# EAGLE board LoNet800L_RFM69W (EAGLE 7.5.0)
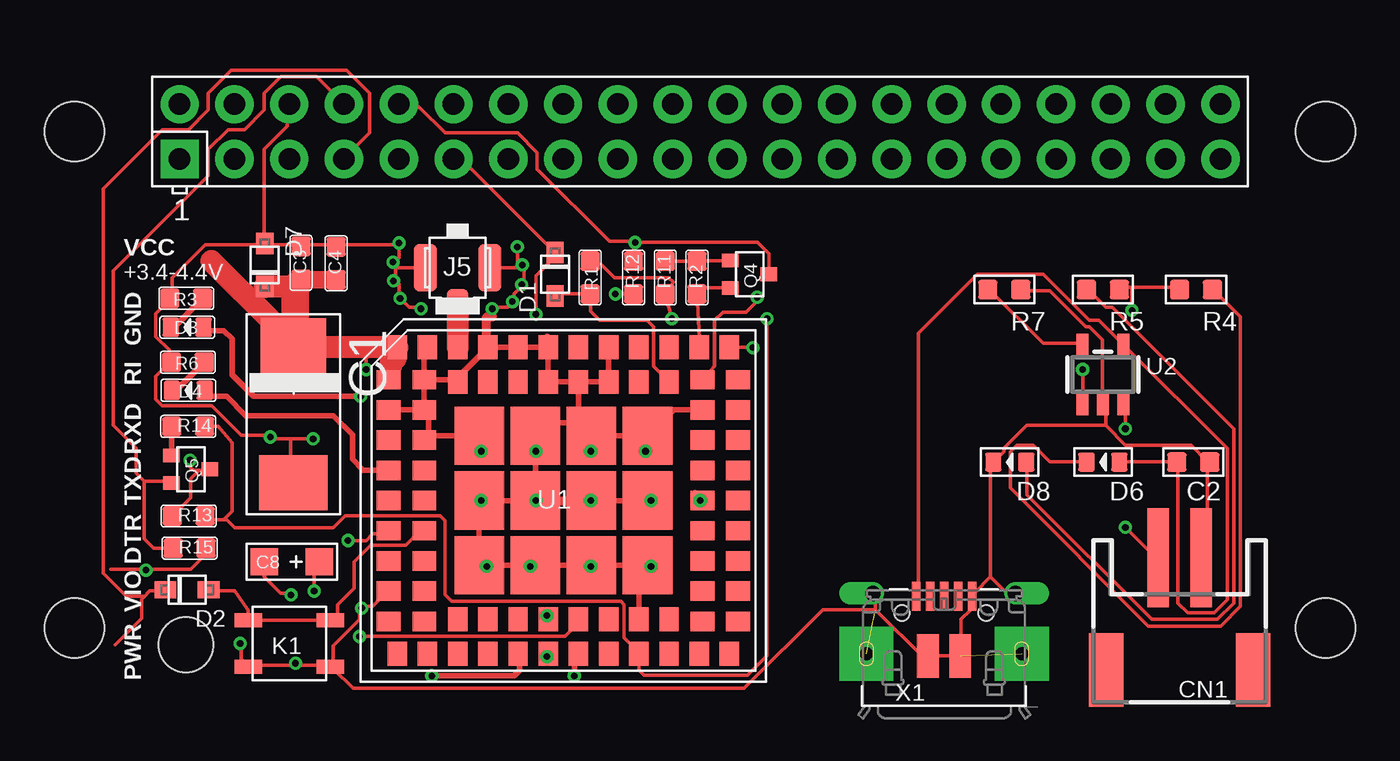
[diagram p0: board, top side]
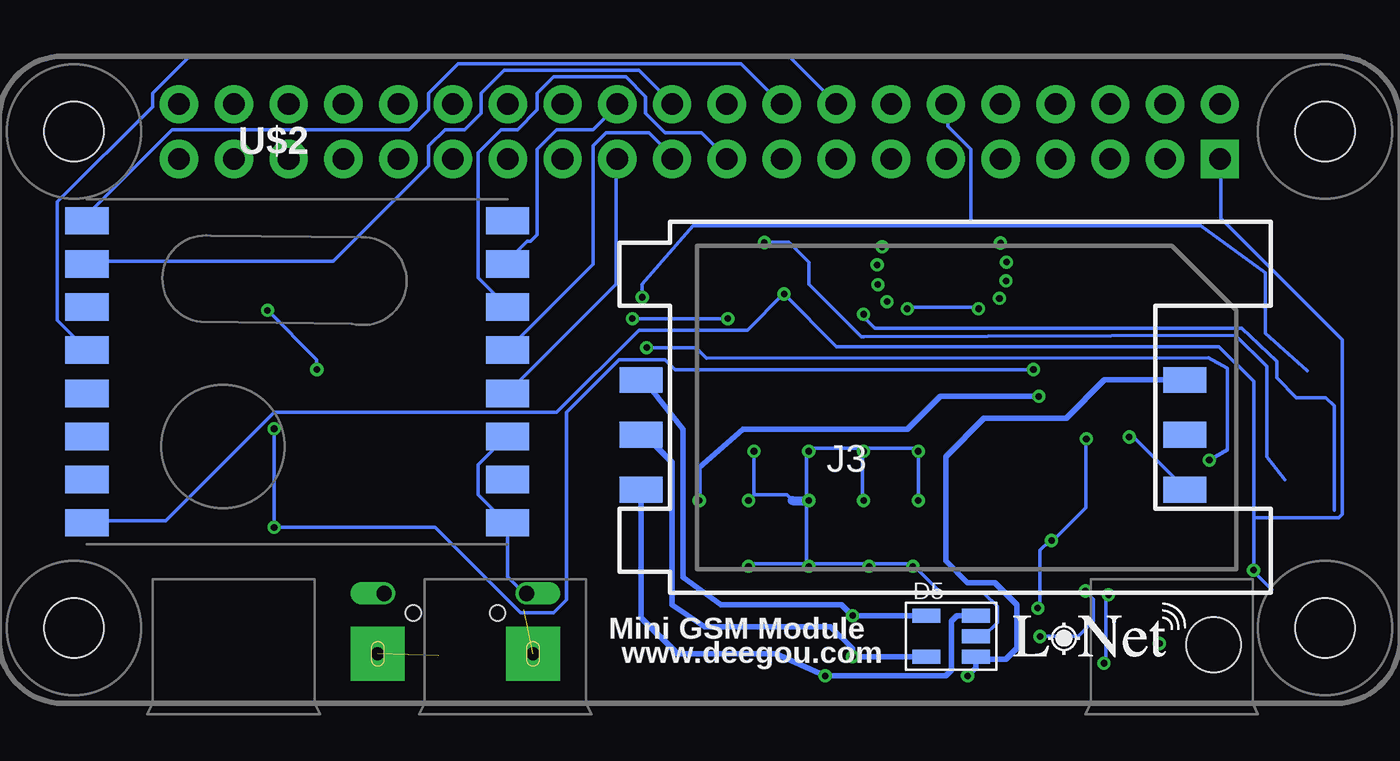
[diagram p1: board, bottom side, seen from below]

Size 7.8 x 1.1 mm. Coordinates in mm from the lower left corner, seen from the top.
Copper layers (1*2*15*16): Top 0.035mm / dielectric 0.2mm / layer 2 0.0175mm / dielectric 1.1mm / layer 15 0.0175mm / dielectric 0.2mm / Bottom 0.035mm
Design rules "DRU": minimum track width 6mil, minimum drill 12mil, track to track 6mil, track to pad 6mil, pad to pad 6mil, via to via 6mil, smd to smd 0mil, copper to edge 10mil, drill to drill 10mil, minimum pad ring 6mil, minimum via ring 6mil, stop-mask expansion 2mil, vias tented up to drill 25mil, thermal gap 10mil
Holes 2.54 mm at -31.25,0.98
tRestrict: area -20.9,1.8 to -7.4,15.3

## Footprints (pad centres in the part's own frame; a part is rotated, then mirrored left to right if it is on the bottom)
AVX-D = smd 2.54 x 3.048: + -3.175,0 | smd 2.54 x 3.175: - 3.175,0
C0603 = smd 0.889 x 0.889: 1 0,0.762; 2 0,-0.762
C0603' = smd 0.889 x 0.889: 1 -0.762,0; 2 0.762,0
AVX-A = smd 1.27 x 1.27: + -1.27,0; - 1.27,0
JSTPH2 = smd 1 x 4.6: 1 -1,-3.7; 2 1,-3.7 | smd 1.6 x 3.4: NC1 -3.4,1.5; NC2 3.4,1.5
SOD-323F = smd 1 x 0.8: A -1,0; C 1,0
0603 = smd 0.762 x 0.889: + -0.762,0; - 0.762,0
SOT23-5L = smd 0.65 x 1.3: 1 0,1.15; 2 0.95,1.15; 3 1.9,1.15; 4 1.9,-1.15; 5 0,-1.15
LED-0603 = smd 0.762 x 0.889: + -0.762,0; - 0.762,0
SIMHOLDER = smd 2 x 1.2: 1 -12.61,-3.81; 2 -12.61,-1.27; 3 -12.61,1.27; 5 12.61,-3.81; 6 12.61,-1.27; 7 12.61,1.27
3P-U-FL = smd 1.05 x 1: D -1.524,0 | smd 2.2 x 1.05: GND1 0,1.5; GND2 0,-1.5
4P-SMD-3.4X3.4X1.3H = smd 1.27 x 0.635: A0 -1.905,1.079; A1 1.905,1.079; B0 -1.905,-1.079; B1 1.905,-1.079
SOT323 = smd 0.635 x 0.762: 1 -0.635,-0.889; 2 0.635,-0.889; 3 0,0.889
0603' = smd 0.889 x 0.889: 1 -0.762,0; 2 0.762,0
R0603 = smd 0.889 x 0.889: 1 0,0.762; 2 0,-0.762
88P-17.8X15.8X2.4 = smd 1.1 x 0.9: 1 -8.1,5.6; 2 -8.1,4.2; 3 -8.1,2.8; 4 -8.1,1.4; 5 -8.1,0; 6 -8.1,-1.4; 7 -8.1,-2.8; 8 -8.1,-4.2; 9 -8.1,-5.6; 22 8.1,-5.6; 23 8.1,-4.2; 24 8.1,-2.8; 25 8.1,-1.4; 26 8.1,0; 27 8.1,1.4; 28 8.1,2.8; 29 8.1,4.2; 30 8.1,5.6; 43 -6.45,5.6; 44 -6.45,4.2; 45 -6.45,2.8; 46 -6.45,1.4; 47 -6.45,0; 48 -6.45,-1.4; 49 -6.45,-2.8; 50 -6.45,-4.2; 51 -6.45,-5.6; 60 6.45,-5.6; 61 6.45,-4.2; 62 6.45,-2.8; 63 6.45,-1.4; 64 6.45,0; 65 6.45,1.4; 66 6.45,2.8; 67 6.45,4.2; 68 6.45,5.6 | smd 0.9 x 1.1: 10 -7.7,-7.1; 11 -6.3,-7.1; 12 -4.9,-7.1; 13 -3.5,-7.1; 14 -2.1,-7.1; 15 -0.7,-7.1; 16 0.7,-7.1; 17 2.1,-7.1; 18 3.5,-7.1; 19 4.9,-7.1; 20 6.3,-7.1; 21 7.7,-7.1; 31 7.7,7.1; 32 6.3,7.1; 33 4.9,7.1; 34 3.5,7.1; 35 2.1,7.1; 36 0.7,7.1; 37 -0.7,7.1; 38 -2.1,7.1; 39 -3.5,7.1; 40 -4.9,7.1; 41 -6.3,7.1; 42 -7.7,7.1; 52 -4.9,-5.5; 53 -3.5,-5.5; 54 -2.1,-5.5; 55 -0.7,-5.5; 56 0.7,-5.5; 57 2.1,-5.5; 58 3.5,-5.5; 59 4.9,-5.5; 69 4.9,5.5; 70 3.5,5.5; 71 2.1,5.5; 72 0.7,5.5; 73 -0.7,5.5; 74 -2.1,5.5; 75 -3.5,5.5; 76 -4.9,5.5 | smd 2.3 x 2.7: 77 -3.9,3; 78 -3.9,0; 79 -3.9,-3; 80 -1.3,-3; 81 1.3,-3; 82 3.9,-3; 83 3.9,0; 84 3.9,3; 85 1.3,3; 86 -1.3,3; 87 -1.3,0; 88 1.3,0
SOT23-5 = smd 0.55 x 1.2: 1 -0.95,-1.3; 2 0,-1.3; 3 0.95,-1.3; 4 0.95,1.3; 5 -0.95,1.3
RASPBERRYPI_BASTELSTUBE_V13_RASPI_BOARD_B+_FULL = drill 1 pad 1.778 square: 1 8.37,25.23 | drill 1 pad 1.778: 2 8.37,27.77; 3 10.91,25.23; 4 10.91,27.77; 5 13.45,25.23; 6 13.45,27.77; 7 15.99,25.23; 8 15.99,27.77; 9 18.53,25.23; 10 18.53,27.77; 11 21.07,25.23; 12 21.07,27.77; 13 23.61,25.23; 14 23.61,27.77; 15 26.15,25.23; 16 26.15,27.77; 17 28.69,25.23; 18 28.69,27.77; 19 31.23,25.23; 20 31.23,27.77; 21 33.77,25.23; 22 33.77,27.77; 23 36.31,25.23; 24 36.31,27.77; 25 38.85,25.23; 26 38.85,27.77; 27 41.39,25.23; 28 41.39,27.77; 29 43.93,25.23; 30 43.93,27.77; 31 46.47,25.23; 32 46.47,27.77; 33 49.01,25.23; 34 49.01,27.77; 35 51.55,25.23; 36 51.55,27.77; 37 54.09,25.23; 38 54.09,27.77; 39 56.63,25.23; 40 56.63,27.77 | hole 2.75: 3.5,3.5; 3.5,26.5; 61.5,3.5; 61.5,26.5
RFM69W-MINPADS = smd 2 x 1.27: 3.3V -11.5,-7; ANA 8,-5; DIO0 -11.5,5; DIO1 -11.5,3; DIO2 -11.5,1; DIO3 -11.5,-1; DIO4 -11.5,-3; DIO5 -11.5,-5; GND 8,-7; GND2 8,-3; MISO 8,1; MOSI 8,3; NC 8,7; NSS 8,5; RESET -11.5,7; SCK 8,-1
4UCONN_20329 = smd 1 x 2: BASE@1 -0.75,-2; BASE@2 0.75,-2 | smd 0.4 x 1.35: D+ 0,0.775; D- -0.65,0.775; GND 1.3,0.775; ID 0.65,0.775; VBUS -1.3,0.775 | drill 0.7 offset: SPRT@1 -3.3,0.9; SPRT@2 3.3,0.9 | drill 0.6 pad 2.5 square: SPRT@3 -3.6,-1.9; SPRT@4 3.6,-1.9 | hole 0.7: -1.95,0; 1.95,0

## Placement (x,y rotation side)
C1  470uF  [AVX-D]  -26.27,11.65 270 top  (outside the outline)
C2  10UF 6.3V  [C0603]  15.46,9.44 270 top  (outside the outline)
C3  33pF  [C0603']  -25.92,18.68 90 top  (outside the outline)
C4  10pF  [C0603']  -24.29,18.65 90 top  (outside the outline)
C8  100uF  [AVX-A]  -26.34,4.82 180 top  (outside the outline)
CN1  [JSTPH2]  14.82,1.31 180 top  (outside the outline)
D1  1N4148  [SOD-323F]  -14.13,18.15 90 top  (outside the outline)
D2  1N4148  [SOD-323F]  -31.2,3.52 180 top  (outside the outline)
D3  RED  [0603]  -31.19,15.69 180 top  (outside the outline)
D4  GREEN  [0603]  -31.14,12.76 180 top  (outside the outline)
D5  ESDA6V1SC5  [SOT23-5L]  -19.09,2.32 270 bottom  (outside the outline)
D6  YELLOW-0603  [LED-0603]  11.27,9.44 180 top  (outside the outline)
D7  PZ3D4V2H  [SOD-323F]  -27.6,18.58 270 top  (outside the outline)
D8  GREEN-0603  [LED-0603]  6.95,9.44 180 top  (outside the outline)
J3  [SIMHOLDER]  -17.31,11.98 0 bottom  (outside the outline)
J5  [3P-U-FL]  -18.66,18.45 90 top  (outside the outline)
K1  3.3X3.3MM  [4P-SMD-3.4X3.4X1.3H]  -26.45,1.03 180 top  (outside the outline)
Q4  BC846BW  [SOT323]  -5.12,18.15 270 top  (outside the outline)
Q5  BC846BW  [SOT323]  -31.03,9.11 270 top  (outside the outline)
R1  10K  [0603']  -12.51,18 270 top  (outside the outline)
R2  47K  [0603']  -7.56,18 90 top  (outside the outline)
R3  100  [0603']  -31.23,17.03 180 top  (outside the outline)
R4  470R  [R0603]  15.58,17.44 90 top  (outside the outline)
R5  1K  [R0603]  11.27,17.44 90 top  (outside the outline)
R6  100  [0603']  -31.16,14.07 180 top  (outside the outline)
R7  2K  [R0603]  6.69,17.44 90 top  (outside the outline)
R11  4.7K  [0603']  -9.03,18 90 top  (outside the outline)
R12  4.7K  [0603']  -10.5,18 90 top  (outside the outline)
R13  4.7K  [0603']  -31.12,6.94 0 top  (outside the outline)
R14  4.7K  [0603']  -31.15,11.09 0 top  (outside the outline)
R15  47K  [0603']  -31.08,5.45 0 top  (outside the outline)
U1  SIM800L  [88P-17.8X15.8X2.4]  -13.75,7.66 0 top  (outside the outline)
U2  [SOT23-5]  11.27,13.5 0 top  (outside the outline)
U$1  RPI-ZERO  [RASPBERRYPI_BASTELSTUBE_V13_RASPI_BOARD_B+_FULL]  -39.91,-1.74 0 top
U$2  RFM69  [RFM69W-MINPADS]  9.49,13.63 0 bottom  (outside the outline)
X1  [4UCONN_20329]  3.9,2.45 0 top

## Library data of the parts
C1 = Common
C2 = Seeed-OPL-Capacitor; MPN: CC0603MRX5R5BB106
C3 C4 C8 = Capacitors
CN1 U2 X1 = LBRmicrobuilder
D1 D2 D5 D7 Q4 Q5 = Semiconductors
D3 D4 = LEDs
D6 = Seeed-OPL-Diode; MPN: 19-217-Y5C-AM1N1VY-3T
D8 = Seeed-OPL-Diode; MPN: 19-217-G7C-AN1P2-3T
J3 = SparkFun-Connectors; PROD_ID: CONN-08536
J5 = Connector
K1 = Buttons
R1-R3 R6 R11-R15 = Resistors
R4 = Seeed-OPL-Resistor; MPN: RC0603JR-07470RL
R5 = Seeed-OPL-Resistor; MPN: RC0603FR-071KL
R7 = Seeed-OPL-Resistor; MPN: RC0603FR-072KL
U1 = SIMCOM
U$1 = RPI-Zero
U$2 = RFM69

## Nets
2.8V: R1.1 R11.1 R13.2 R14.2 U1.18
ANT: J5.D U1.40
DTR: D1.A R1.2 U1.69
GND: C1.- C2.1 C3.2 C4.2 C8.- CN1.1 D5.2 D7.A D8.- J3.5 J5.GND1 J5.GND2 K1.A0 K1.A1 R3.2 R6.2 R7.2 U1.2 U1.6 U1.8 U1.35 U1.37 U1.38 U1.39 U1.41 U1.43 U1.44 U1.45 U1.58 U1.67 U1.71 U1.72 U1.73 U1.76 U1.77 U1.78 U1.79 U1.80 U1.81 U1.82 U1.83 U1.84 U1.85 U1.86 U1.87 U1.88 U2.2 U$1.6 U$2.GND U$2.GND2 X1.BASE@1 X1.BASE@2 X1.GND X1.SPRT@1 X1.SPRT@2 X1.SPRT@3 X1.SPRT@4
H_DTR: D1.C U$1.11
H_RXD: Q5.2 R15.1 U$1.8
H_TXD: Q4.3 R12.2 U$1.10
N$1: C8.+ U1.56
N$3: C2.2 D6.+ U2.4 X1.VBUS
N$4: D3.- R3.1
N$5: D6.- R4.2
N$6: Q4.1 R2.2 R11.2
N$7: R4.1 R5.2 U2.1
N$8: D4.- R6.1
N$9: Q5.1 R14.1
N$10: D8.+ R5.1
N$11: R7.1 U2.5
NET: D3.+ U1.64
PWR: D2.C U$1.7
PWRKEY: D2.A K1.B0 K1.B1 U1.48
R_DIO0: U$1.22 U$2.DIO0
R_DIO2: U$1.16 U$2.DIO2
R_MISO: U$1.21 U$2.MISO
R_MOSI: U$1.19 U$2.MOSI
R_NSS: U$1.24 U$2.NSS
R_RESET: U$1.18 U$2.RESET
R_SCK: U$1.23 U$2.SCK
RI: U1.68 U$1.12
RXD: Q5.3 R13.1 U1.31
SIM_CLK: D5.5 J3.3 U1.55
SIM_DATA: D5.3 J3.7 U1.14
SIM_RST: D5.4 J3.2 U1.15
STATUS: D4.+ U1.4
TXD: Q4.2 R2.1 U1.32
VBAT: C1.+ C3.1 C4.1 CN1.2 D7.C U1.1 U1.42 U2.3
VIO: R12.1 R15.2 U$1.1 U$2.3.3V
VSIM: D5.1 J3.1 U1.16

## Tracks (layer width: path | path; a pad name or v marks a point on that pad's centre or on a via)
2.8V  (via drill 0.3 pad 0.61)
  Top 0.152: v-8.72,16.09 R11.1 -8.65,17.77 -8.88,18 -11.39,18 -12,18.61 R1.1 | v-4.3,16.09 -4.3,0.47 -5.22,-0.44 -10.02,-0.44 -10.25,-0.22 U1.18 -10.25,0.63 -10.93,1.31 -10.93,2.83 -11.09,2.98 -18.93,2.98 -19.24,3.29 -19.24,6.72 -19.47,6.95 -23.86,6.95 -24.42,6.39 -28.99,6.39 -29.37,6.77 -29.5,6.77 | -29.5,6.77 -30.28,6.77 R13.2 | R14.2 -29.76,11.09 -29.12,10.33 -29.12,7.15 -29.5,6.77
  Bottom 0.152: v-8.72,16.09 v-4.3,16.09
ANT
  Top 0.813: U1.40
  Top 1.016: J5.D U1.40
DTR
  Top 0.152: U1.69 -8.85,13.17 -9.56,13.88 -9.56,15.71 -9.87,16.02 -12.08,16.02 -12.48,16.42 -12.48,17.21 R1.2 -14.05,17.23 D1.A
GND  (via drill 0.3 pad 0.61)  (2 unrouted)
  Top 0.152: C8.- -27.6,4.2 -27.62,4.13 -26.86,3.37 -26.4,3.37 v-26.38,3.28 | 6.06,4.13 6.06,9.31 D8.- 6.67,9.92 6.67,10.07 7.73,11.14 11.39,11.14 | 6.06,4.13 5.3,3.37 X1.GND 5.14,3.21 5.14,2.6 4.69,2.15 4.69,0.47 X1.BASE@2 4.53,0.47 3.16,0.47 X1.BASE@1 3.01,0.32 0.73,2.6 | 6.06,4.13 6.82,3.37 7.13,3.37 X1.SPRT@2 | 0.73,2.6 0.73,3.21 X1.SPRT@1 | R7.2 7.58,17.39 8.8,17.39 10.48,15.71 10.63,15.71 11.24,15.1 11.24,12.21 U2.2 11.39,12.05 11.39,11.14 | CN1.1 15.96,5.04 16.12,5.19 16.12,9.31 C2.1 16.12,9.46 15.35,10.22 12.31,10.22 11.39,11.14 | v-15.66,18.58 -15.58,18.45 -15.58,17.69 v-15.68,17.67 -15.73,17.54 -16.04,17.23 -16.04,16.93 v-16.12,16.88 -16.19,16.78 -16.34,16.62 -16.95,16.62 v-17.05,16.55 | v-15.89,19.42 -15.89,18.76 -15.73,18.61 v-15.66,18.58 | J5.GND2 -15.73,18.45 v-15.66,18.58 | -26.4,10.53 -25.49,10.53 v-25.36,10.52 | -26.4,10.53 -27.32,10.53 v-27.34,10.6 -27.47,10.68 -28.69,10.68 -30.06,12.05 -32.35,12.05 -32.65,12.36 -32.65,13.42 -32.04,14.03 R6.2 -32.04,14.19 -32.04,14.64 -32.65,15.25 -32.65,16.32 -32.04,16.93 R3.2 -31.89,17.08 -31.89,18 -30.37,19.52 -27.62,19.52 D7.A | -26.4,10.53 -26.4,8.55 C1.- | U1.8 -21.98,3.37 -22.59,2.76 -23.05,2.76 v-23.11,2.67 -23.2,2.6 -23.2,2.15 -24.42,0.93 -24.42,0.01 K1.A0 | v-23.73,5.8 -22.9,5.8 -22.59,6.11 -21.98,6.11 U1.6 | v-28.74,1.03 -28.69,0.93 -28.69,0.32 -28.38,0.01 K1.A1 -28.23,0.01 -26.25,0.01 v-26.17,0.11 -26.1,0.01 -24.57,0.01 K1.A0 | -21.53,17.84 -21.53,18.45 | -21.53,18.45 -21.53,18.61 v-21.65,18.71 | -21.37,19.52 -21.37,18.91 -21.53,18.76 v-21.65,18.71 | -21.53,17.84 -21.37,17.69 -21.37,17.08 v-21.32,17.03 -20.92,16.62 -20.46,16.62 v-20.36,16.55
  Top 0.152: -21.53,17.84 v-21.63,17.84 | J5.GND1 -21.53,18.45 | -21.53,18.45 v-21.65,18.71 | D7.A -27.47,19.52 -25.95,19.52 C3.2 -25.79,19.52 -24.42,19.52 C4.2 -24.27,19.52 -21.37,19.52 | -21.37,19.52 v-21.37,19.6 | U$1.6 -26.55,25.92 -26.55,25.01 -27.62,23.94 -27.62,19.67 D7.A | 0.73,2.6 -1.71,2.6 -5.37,-1.05 -23.51,-1.05 -24.42,-0.14 K1.A0
  Top 0.254: U1.67 -8.65,11.86 U1.84 U1.85 -13.05,11.26 | U1.72 -13.05,11.26 | U1.72 U1.71 U1.35 | U1.72 U1.73 U1.37 | U1.37 -14.45,15.22 -14.52,15.28 | -13.05,11.26 -14.45,11.26 U1.86 U1.87 U1.78 U1.79 U1.80 U1.81 U1.82 -10.25,4.26 U1.58 | U1.77 -20,10.66 | -20,10.66 U1.45 | -20,10.66 -20,11.66 U1.44 | U1.44 U1.2 | U1.44 U1.43 | U1.43 -20.2,14.61 U1.41 | U1.43 -18.75,13.26 U1.76 -18.65,13.36 U1.39 U1.38 U1.37 | U1.88 U1.83
  Top 0.406: U1.39 -17.31,14.76 -17.31,16.17 -17.05,16.17 v-17.05,16.55 | U1.87 v-12.48,7.66 U1.88
  Bottom 0.152: X1.SPRT@1 0.73,3.37 1.49,4.13 1.49,6.57 U$2.GND 1.64,6.72 2.86,7.94 2.86,9.31 1.64,10.53 U$2.GND2 | -15.28,4.74 -17.26,4.74 v-17.31,4.61 -17.41,4.59 -18.63,3.37 -20.61,3.37 -21.22,2.76 -21.22,1.99 -20.61,1.38 -20.31,1.38 D5.2 | -12.38,4.74 -9.79,4.74 v-9.69,4.61 | -15.28,4.74 -12.53,4.74 v-12.48,4.61 -12.38,4.74 | -15.28,4.74 v-15.28,4.61 | v-17.56,7.66 v-17.56,9.94 -17.56,10.07 -15.12,10.07 v-15.02,9.94 | v-15.02,7.66 -14.97,7.79 -14.97,9.92 v-15.02,9.94 | -9.94,7.94 v-9.94,9.94 | -9.94,7.94 -9.79,7.79 v-9.69,7.66 | -9.94,7.94 -11.47,7.94 -11.62,7.79 -11.72,7.66 | v-15.02,9.94 -14.97,10.07 -12.53,10.07 v-12.48,9.94 -12.38,9.92 -12.38,7.79 v-12.48,7.66 -12.38,7.48 -12.38,4.74 | J3.5 -29.91,8.24 -27.47,10.68 v-27.34,10.6 | v-23.11,2.67 -23.2,2.76 -23.2,5.35 -23.66,5.8 v-23.73,5.8 -23.81,5.8 -25.34,7.33 -25.34,10.38 v-25.36,10.52 | v-26.38,3.28 -26.25,3.21 -26.25,0.17 v-26.17,0.11 | v-17.05,16.55 -17.11,16.62 -20.31,16.62 v-20.36,16.55
  Bottom 0.406: -11.72,7.66 v-12.48,7.66
H_DTR  (via drill 0.3)
  Top 0.152: -13.81,19.47 D1.C | D1.C -14.13,18.96 -15.02,18.07 v-15.02,16.29 | U$1.11 -18.78,23.48 -18.48,23.48 -14.21,19.22 D1.C
  Bottom 0.152: -36.84,7.2 -36.84,12.05 -36.46,12.43 -35.09,12.43 -34.17,13.35 -34.17,14.11 -32.57,15.63 -15.56,15.63 -15.02,16.17 v-15.02,16.29
H_RXD
  Top 0.152: -34.63,11.14 | -34.63,11.14 -33.56,10.07 -33.56,8.93 -33.18,8.55 | -31.99,8.29 Q5.2 -31.99,8.55 -33.18,8.55 | R15.1 -32.76,5.45 -33.18,5.88 -33.18,8.55 | -34.63,11.14 -34.63,18.3 -30.21,22.72 -30.21,23.94 -29.3,24.85 -28.54,24.85 -27.62,25.77 -27.62,26.53 -26.86,27.29 -25.18,27.29 -23.96,26.07 U$1.8
H_TXD  (via drill 0.3 pad 0.61)
  Top 0.152: Q4.3 -4.23,19.09 -4.76,19.62 v-10.43,19.62 | R12.2 -10.5,19.55 v-10.43,19.62 | U$1.10 -21.37,25.92 -20.46,25.92 -19.24,24.7 -15.89,24.7 -14.97,23.79 -14.97,23.03 -11.62,19.67 -10.55,19.67 v-10.43,19.62
  Bottom 0.152: -34.56,8.62 -33.72,9.69 -33.72,13.88 -32.27,15.33 -15.05,15.25 -14.92,15.25 -12.48,17.69 -12.48,18.71 -11.57,19.62 v-10.43,19.62
N$1  (via drill 0.3)
  Top 0.152: U1.56 -13.05,2.01 -13.68,1.36 v-23.2,1.36 | C8.+ -25.44,4.45 -25.31,4.33 v-25.31,3.47
  Bottom 0.152: v-23.2,1.36 -24.98,1.36 -25.69,2.07 -25.69,3.09 v-25.31,3.47
N$3
  Top 0.152: D6.+ 12.16,9.46 14.59,9.46 C2.2 14.75,9.31 14.75,2.91 15.2,2.45 16.42,2.45 17.03,3.06 17.03,10.07 12.31,14.8 U2.4 12.16,14.95 11.09,16.02 10.63,16.02 8.5,18.15 5.45,18.15 2.71,15.41 2.71,3.37 X1.VBUS
N$4
  Top 0.254: D3.- -31.94,15.56 R3.1
N$5
  Top 0.152: D6.- 10.48,9.46 8.8,9.46 8.04,10.22 7.28,10.22 6.97,9.92 6.97,8.24 13.37,1.84 16.73,1.84 17.64,2.76 17.64,16.17 16.42,17.39 R4.2
N$6
  Top 0.152: Q4.1 -7.43,18.78 R2.2 R11.2
N$7  (via drill 0.3)
  Top 0.152: 12.61,17.54 14.75,17.54 R4.1 | 12.61,17.54 12.16,17.54 R5.2 | v10.33,13.73 10.33,12.21 U2.1 | 12.61,17.54 v12.61,16.47
  Bottom 0.152: v10.33,13.73 10.33,14.19 v12.61,16.47
N$8
  Top 0.254: D4.- -31.9,12.57 R6.1
N$9
  Top 0.254: Q5.1 -31.92,10.96 R14.1
N$10
  Top 0.152: D8.+ 7.73,9.31 7.73,7.94 13.53,2.15 16.58,2.15 17.34,2.91 17.34,10.99 11.7,16.62 11.39,16.62 10.63,17.39 R5.1
N$11
  Top 0.152: R7.1 6.06,17.39 8.5,14.95 10.17,14.95 U2.5
NET  (via drill 0.3 pad 0.61)
  Top 0.254: v-7.4,7.66 -7.66,8.01 U1.64 | v-23.15,12.48 -28.1,12.48 -29.12,13.5 -29.12,15.15 -29.5,15.53 -30.4,15.53 D3.+
  Bottom 0.254: v-23.15,12.48 -18.58,12.48 -17.05,10.96 -9.43,10.96 -7.4,9.18 v-7.4,7.66
PWR
  Top 0.152: -34.53,0.98 -33.31,2.2 -33.31,3.09 -33.22,3.18 | -33.22,3.18 -32.93,3.47 -32.25,3.47 D2.C | -33.22,3.18 -33.26,3.21 -34.02,3.21 -35.09,4.28 -35.09,22.11 -32.35,24.85 -31.13,24.85 -30.21,25.77 -30.21,26.53 -29.14,27.6 -23.81,27.6 -22.75,26.53 -22.75,24.7 -23.81,23.64 U$1.7
PWRKEY
  Top 0.152: D2.A -30.14,3.47 -28.99,3.47 -28.36,2.58 K1.B1 K1.B0 -24.22,2.18 -24.22,2.83 -23.46,3.59 -23.46,4.81 -22.69,5.58 -21.07,5.58 -20.39,6.26 U1.48
R_DIO0
  Bottom 0.152: U$2.DIO0 20.84,18.76 9.56,18.76 5.14,23.18 5.14,24.09 4.38,24.85 3.47,24.85 2.71,25.62 2.71,26.53 1.64,27.6 -4.61,27.6 -6.13,26.07 U$1.22
R_DIO2
  Bottom 0.152: U$2.DIO2 20.99,14.64 22.37,16.02 22.37,21.5 17.95,25.92 17.95,26.53 16.27,28.21 -11.62,28.21 -13.75,26.07 U$1.16
R_MISO
  Bottom 0.152: U$2.MISO 1.49,14.64 -2.48,18.61 -2.48,24.09 -3.09,24.7 -5.07,24.7 -6.13,23.64 U$1.21
R_MOSI
  Bottom 0.152: U$2.MOSI 1.64,16.78 2.86,18 2.86,23.79 1.79,24.85 1.03,24.85 0.12,25.77 0.12,26.53 -0.65,27.29 -4,27.29 -4.91,26.38 -4.91,25.62 -5.83,24.7 -7.5,24.7 -8.57,23.64 U$1.19
R_NSS
  Bottom 0.152: U$2.NSS 1.49,18.76 0.57,19.67 0.42,19.67 0.12,19.98 0.12,23.94 -0.8,24.85 -2.48,24.85 -3.54,25.92 U$1.24
R_RESET
  Bottom 0.152: U$2.RESET 20.84,20.74 20.84,21.04 17.03,24.85 6.06,24.85 5.14,25.77 5.14,26.53 3.77,27.9 -9.33,27.9 -11.16,26.07 U$1.18
R_SCK
  Bottom 0.152: U$2.SCK 1.49,12.66 -3.54,17.69 -3.54,23.48 U$1.23
RI  (via drill 0.3 pad 0.61)
  Top 0.152: U1.68 -6.74,13.88 -6.74,16.02 -6.36,16.4 -5.3,16.4 -4.76,16.93 v-4.76,17.08
  Bottom 0.152: -35.59,13.68 -33.64,15.41 -33.64,18.22 -30.67,20.38 -20,20.38 | -20,20.38 -7.12,20.38 -4.76,17.69 v-4.76,17.08 | -20,20.38 -20,23.94 -18.93,25.01 -18.93,25.92 U$1.12
RXD  (via drill 0.3 pad 0.61)
  Top 0.152: U1.31 -4.97,14.76 v-4.97,14.75 | v-31.05,9.53 -31.05,9.21 -30.9,9.06 -30.64,9.06 | -30.64,9.06 -30.2,9.06 Q5.3 | R13.1 -31.87,6.94 -31.02,7.79 -31.02,8.67 -30.64,9.06
  Bottom 0.152: v-4.97,14.75 -7.25,14.75 -7.73,14.26 -31,14.29 -31.89,13.78 -31.89,10.01 v-31.05,9.53
SIM_CLK  (via drill 0.3 pad 0.61)
  Top 0.254: v-14.52,2.32 -14.52,2.22 U1.55
  Bottom 0.152: J3.3 -4.76,13.27 -4.79,13.3
  Bottom 0.254: -4.7,13.41 -4.79,13.3 -6.64,10.96 -6.64,4.1 -8.42,2.83 -14.01,2.83 v-14.52,2.32 D5.5
SIM_DATA  (via drill 0.3 pad 0.61)
  Top 0.254: -15.79,0.63 U1.14 | U1.14 -16.05,0.56 | v-19.85,-0.47 -16.04,-0.47 -15.79,-0.22 -15.79,0.49 U1.14
  Bottom 0.254: J3.7 -26.2,13.25 -24.42,11.47 -20.61,11.47 -18.83,9.69 -18.83,4.86 -19.85,3.85 -21.12,3.85 -22.14,2.83 -22.14,0.8 -21.63,0.29 -20.37,0.29 D5.3 -20.24,-0.08 v-19.85,-0.47
SIM_RST  (via drill 0.3 pad 0.61)
  Top 0.254: v-14.52,0.42 -14.52,0.5 U1.15
  Bottom 0.152: J3.2 -4.76,10.68 -4.86,10.71
  Bottom 0.254: -4.86,10.71 -6.13,9.44 -6.13,2.83 -7.66,1.82 -13.5,1.82 -14.52,0.8 v-14.52,0.42 -15.16,0.42 D5.4
STATUS
  Top 0.254: U1.4 -23.03,9.06 -23.53,9.56 -23.53,10.71 -24.42,11.6 -28.48,11.6 -29.37,12.48 -30.35,12.48 D4.+
TXD
  Top 0.152: U1.32 -7.43,14.76 R2.1 -7.43,17.51 Q4.2
VBAT  (via drill 0.3)
  Top 0.152: v12.31,10.99 12.31,12.05 U2.3 | v12.31,6.41 13.68,5.04 CN1.2 | v-22.9,13.73 -22.9,14.76
  Top 0.813: U1.1 -21.85,14.36 -21.56,14.36 -21.43,14.23 -21.43,14.18 -21.68,13.94 -21.68,13.86 -21.66,13.84 U1.42 | C4.1 -25.89,17.89 C3.1 | -27.21,15.91 -27.21,15.66 -26.2,14.64 | -26.2,17.56 -26.2,17.64 C3.1 | C3.1 -25.92,17.46 | -25.96,17.95 C3.1
  Top 1.016: U1.42 -22.9,14.76 -26.2,14.76 C1.+ -27.21,15.77 -27.21,15.91 -30.06,18.76 | -26.2,17.56 -27.6,17.56 D7.C
  Top 1.27: -26.2,14.64 -26.2,17.56
  Bottom 0.152: v12.31,10.99 v12.31,6.41 4.84,6.41 0.88,2.45 -0.65,2.45 -1.26,3.06 -1.26,11.75 -3.7,14.19 -5.83,14.19 -6.29,13.73 v-22.9,13.73
VIO  (via drill 0.3, 0.3 pad 0.61)
  Top 0.152: v-11.34,17.23 R12.1 | R15.2 -30.32,5.19 -31.02,4.48 -33.11,4.48 | -33.11,4.48 -34.74,4.48 | v-33.11,4.43 -33.11,4.48
  Bottom 0.152: -33.94,3.52 -33.11,4.36 v-33.11,4.43 -33.11,6.87 | -33.11,6.87 -33.11,13.2 -31.51,14.8 -13.78,14.8 v-11.34,17.23 -11.32,17.23 -9.64,15.56 -4.61,15.56 -0.8,11.75 12.31,11.75 17.34,6.72 20.84,6.72 U$2.3.3V | -33.11,6.87 -37.07,6.87 -37.22,7.02 -37.22,15.1 -31.58,20.74 -31.58,23.48 U$1.1
VSIM  (via drill 0.3 pad 0.61)
  Top 0.254: v-13.25,-0.47 -13.25,0.75 U1.16
  Bottom 0.254: J3.1 -4.7,2.23 -6.39,0.55 -10.96,0.55 v-13.25,-0.47 -18.83,-0.47 -19.09,-0.22 -19.09,2.07 -19.34,2.32 D5.1

## Text on the board
tPlace: VCC | +3.4-4.4V | GND | RI | RXD | TXD | DTR | VIO | PWR
bPlace: Mini GSM Module | www.deegou.com